# Altium PCB SimpleNode35.PcbDoc
Units mm, origin at the board's own origin, x right, y up, seen from the top; angles counter-clockwise.
Board outline 33 x 14 mm, 2 copper layers (Top Layer, Bottom Layer); 45 components, 43 nets, 178 pads, 33 vias.
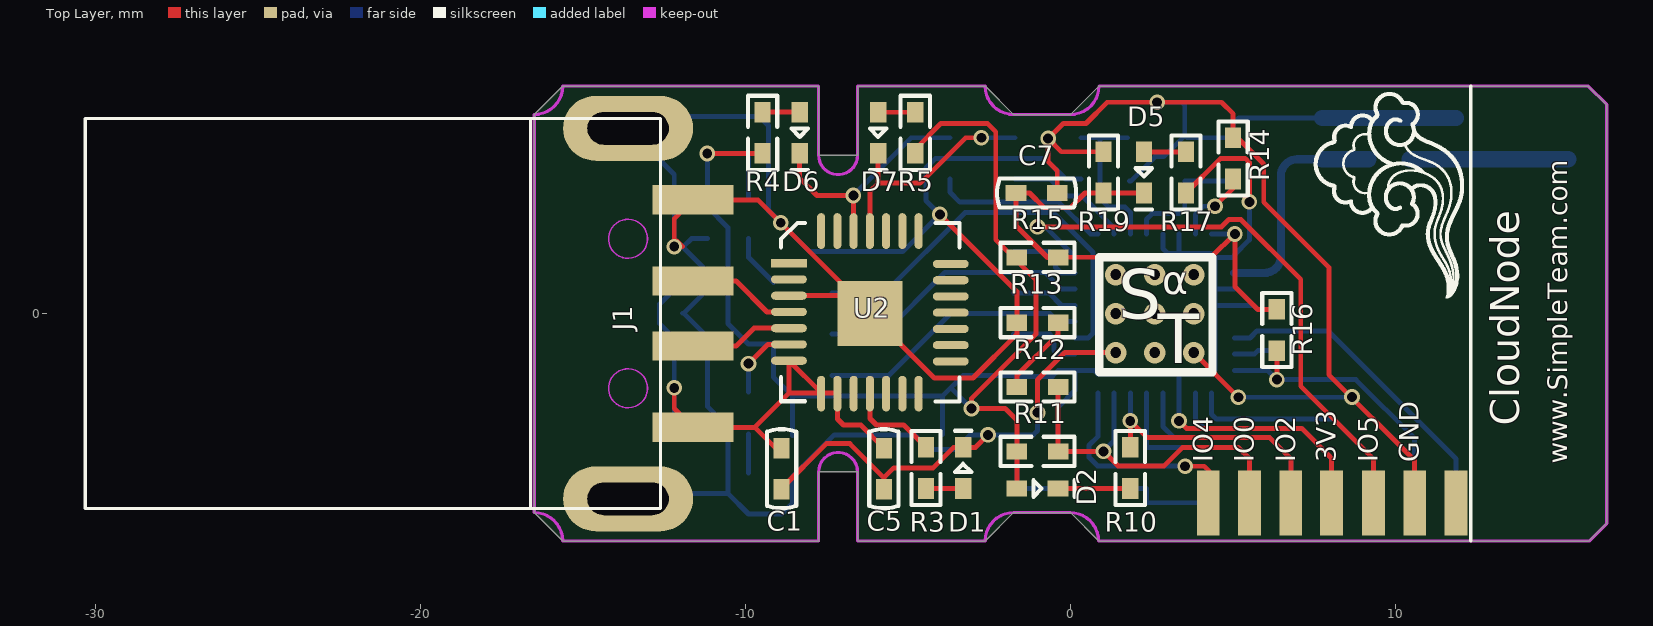
[diagram p0: Top Layer view]
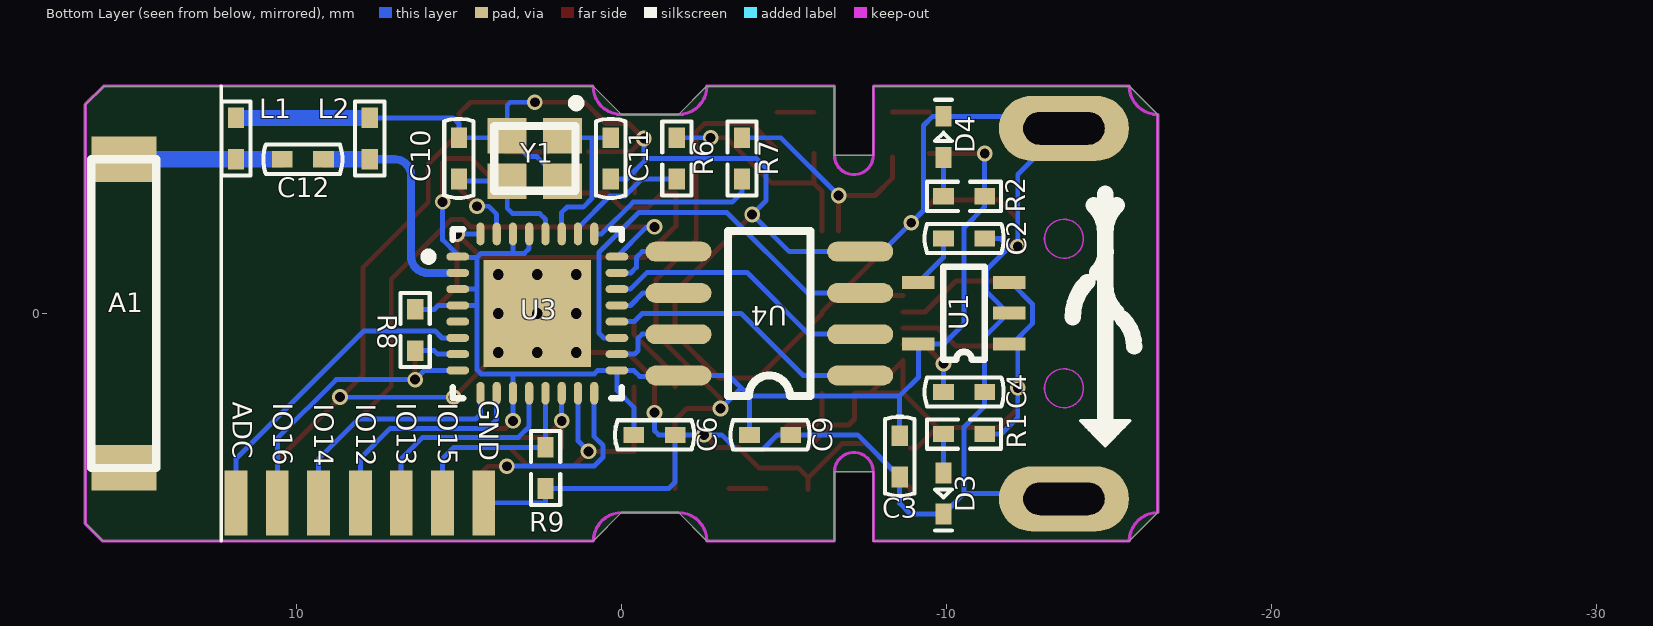
[diagram p1: Bottom Layer view, seen from below]

## Layer stack, top to bottom
Top Layer: signal copper 0.0356
Dielectric: dielectric 0.32, FR-4, Dk 4.8
Bottom Layer: signal copper 0.0356

## Board outline
16.5,6.436 15.936,7 0.875,7 0,6.125 -1.75,6.125 -2.625,7 -6.55,7 -6.55,4.875 -7.75,4.875 -7.75,7 -15.625,7 -16.5,6.125 -16.5,-6.125 -15.625,-7 -7.75,-7 -7.75,-4.875 -6.55,-4.875 -6.55,-7 -2.625,-7 -1.75,-6.125 0,-6.125 0.864,-6.989 0.864,-7 15.962,-7 16.5,-6.462 16.5,6.436

## Design rules (kind name [scope] priority, off if disabled: settings)
Clearance [All] p1: gap=0.127
DiffPairsRouting [All] p1: maxlimit=0.254 minlimit=0.254 mostfreqgap=0.254 maxuncoupledlength=12.7
MinimumSolderMaskSliver [All] p1 off: minsoldermaskwidth=0.127
PolygonConnect [All] p1: connectstyle=Relief reliefconductorwidth=0.254 reliefentries=4 polygonreliefangle="90 Angle"
RoutingVias [All] p1: holewidth=0.305 width=0.483 viastyle="Through Hole" minholewidth=0.305 minwidth=0.483 maxholewidth=0.711 maxwidth=1.27
SilkToSilkClearance [All] p1 off: silktosilkclearance=0.127
SilkscreenOverComponentPads [All] p1 off: minsilkscreentomaskgap=0.127
SolderMaskExpansion [All] p1: expansion=0.102
Width [All] p1: maxlimit=0.508 minlimit=0.152 preferedwidth=0.152
24 further rules are at their usual default settings.

## Classes and differential pairs
differential pair UD: +UD_P -UD_N

## Components (designator, comment, footprint, x,y, rotation, side; value= is the part's Value field where it differs from the comment)
A1 "2.4GHz" AN9520-245 15.316,0 r180 bottom
C1 "105" C0402 -8.89,-4.775 r90 top
C2 "CAP" C0402 -10.541,2.311 r0 bottom
C3 "CAP" C0402 -8.56,-4.394 r90 bottom
C4 "10V" C0402 -10.541,-2.413 r0 bottom
C5 "10V" C0402 -5.74,-4.775 r270 top
C6 "10V" C0402 -1.016,-3.734 r0 bottom
C7 "10V" C0402 -1.041,3.708 r180 top
C9 "10V" C0402 -4.572,-3.734 r0 bottom
C10 "10V" C0402 5.004,4.775 r90 bottom locked
C11 "10V" C0402 0.33,4.775 r270 bottom locked
C12 "10V" C0402 9.804,4.75 r180 bottom
D1 "STA" LED0402 -3.302,-4.75 r90 top
D2 "STA" LED0402 -1.016,-5.385 r0 top
D3 "PW5V" LED0402 -9.906,-5.537 r270 bottom
D4 "PW3V3" LED0402 -9.906,5.436 r90 bottom
D5 "STA" LED0402 2.261,4.343 r270 top
D6 "TXD" LED0402 -8.331,5.563 r270 top
D7 "RXD" LED0402 -5.918,5.563 r270 top
J1 "USB-A" "USB 2.0 Type A 公头 沉板" -13.614,0 r0 top
L1 "NC" L0402 11.862,5.385 r90 bottom
L2 "NC" L0402 7.747,5.385 r90 bottom
R1 "5%" R0402 -10.541,-3.708 r0 bottom
R2 "5%" R0402 -10.541,3.607 r180 bottom
R3 "5%" R0402 -4.445,-4.75 r270 top
R4 "5%" R0402 -9.474,5.563 r270 top
R5 "5%" R0402 -4.775,5.563 r90 top
R6 "5%" R0402 -1.702,4.775 r90 bottom
R7 "5%" R0402 -3.708,4.775 r270 bottom
R8 "1%" R0402 6.35,-0.508 r270 bottom
R9 "5%" R0402 2.337,-4.75 r90 bottom
R10 "5%" R0402 1.841,-4.75 r90 top
R11 "5%" R0402 -1.016,-4.242 r180 top
R12 "5%" R0402 -1.016,-2.261 r180 top
R13 "FLASH" R0402 -1.016,-0.279 r0 top
R14 "1%" R0402 5.004,4.775 r90 top
R15 "5%" R0402 -1.016,1.727 r180 top
R16 "5%" R0402 6.35,-0.508 r270 top
R17 "5%" R0402 3.556,4.343 r90 top
R19 "RESET" R0402 1.016,4.343 r270 top
U1 "SPX3819M5-L-3-3" SOT25-5 -10.541,0.076 r0 bottom
U2 "CP2102" MLP28 -6.172,0 r0 top locked
U3 "ESP8266" QFN32L 2.591,0 r180 bottom
U4 "2M Flash" SOP8 -4.547,0 r0 bottom locked
Y1 "10ppm" XTAL-2520 2.667,4.775 r0 bottom locked

## Footprints (in the part's own frame and the unit in brackets; to place one, negate y for a bottom-side part, rotate by r counter-clockwise, add the part's x,y. Pads: shape width x height; smd on the part's side, far side on the other; paste and mask are expansions set on the pad)
AN9520-245 [mm]
  rect 2x1.4 smd: 0(0,-4.75) 1(0,4.75)
  silkscreen extent -1,-4.75 1,4.75
C0402 [mm]
  rect 0.635x0.5 smd: 1(-0.635,0) 2(0.635,0)
  silkscreen extent -1.22,-0.45 1.22,0.45
L0402 [mm]
  rect 0.635x0.5 smd: 1(-0.635,0) 2(0.635,0)
  silkscreen extent -1.14,-0.45 1.14,0.45
LED0402 [mm]
  rect 0.635x0.5 smd: 1(-0.632,0) 2(0.633,0)
  silkscreen extent -0.13,-0.25 1.14,0.25
MLP28 [mm]
  rect 1.1x0.25 smd: 1(-2.489,1.549)
  oval 1.1x0.25 smd: 2(-2.489,1.049) 3(-2.489,0.549) 4(-2.489,0.049) 5(-2.489,-0.451) 6(-2.489,-0.951) 7(-2.489,-1.451) 15(2.489,-1.473) 16(2.489,-0.973) 17(2.489,-0.473) 18(2.489,0.027) 19(2.489,0.527) 20(2.489,1.027) 21(2.489,1.527)
  rect 2x2 smd: 3(0,0)
  oval 0.25x1.1 smd: 8(-1.499,-2.464) 9(-0.999,-2.464) 10(-0.499,-2.464) 11(0.001,-2.464) 12(0.501,-2.464) 13(1.001,-2.464) 14(1.501,-2.464) 22(1.499,2.54) 23(0.999,2.54) 24(0.499,2.54) 25(-0.001,2.54) 26(-0.501,2.54) 27(-1.001,2.54) 28(-1.501,2.54)
  silkscreen extent -2.74,-2.71 2.76,2.79
QFN32L [mm]
  oval 0.7x0.25 smd: 1(-2.45,1.75) 2(-2.45,1.25) 3(-2.45,0.75) 4(-2.45,0.25) 5(-2.45,-0.25) 6(-2.45,-0.75) 7(-2.45,-1.25) 8(-2.45,-1.75) 17(2.45,-1.75) 18(2.45,-1.25) 19(2.45,-0.75) 20(2.45,-0.25) 21(2.45,0.25) 22(2.45,0.75) 23(2.45,1.25) 24(2.45,1.75)
  oval 0.25x0.7 smd: 9(-1.75,-2.45) 10(-1.25,-2.45) 11(-0.75,-2.45) 12(-0.25,-2.45) 13(0.25,-2.45) 14(0.75,-2.45) 15(1.25,-2.45) 16(1.75,-2.45) 25(1.75,2.45) 26(1.25,2.45) 27(0.75,2.45) 28(0.25,2.45) 29(-0.25,2.45) 30(-0.75,2.45) 31(-1.25,2.45) 32(-1.75,2.45)
  rect 3.3x3.3 smd: 33(0,0)
  silkscreen extent -3.48,-2.6 2.6,2.6, body extent -2.58,-2.58 2.58,2.58, height 0.8
R0402 [mm]
  rect 0.635x0.5 smd: 1(-0.635,0) 2(0.635,0)
  silkscreen extent -1.14,-0.45 1.14,0.45
SOP8 [mil]
  oval 80x24 smd: 1(-110,75) 2(-110,25) 3(-110,-25) 4(-110,-75) 5(110,-75) 6(110,-25) 7(110,25) 8(110,75)
  silkscreen extent -50,-100 50,100, body extent -125,-98 125,99, height 74
SOT25-5 [mm]
  rect 1x0.4 smd: 1(-1.397,1.016) 2(-1.397,0.066) 3(-1.397,-0.884) 4(1.403,-0.884) 5(1.403,1.016)
  silkscreen extent -0.64,-1.36 0.64,1.49
"USB 2.0 Type A 公头 沉板" [mm]
  oval 1.5x1.4 on Bottom Overlay: 1(-1.27,3.683)
  rect 2.5x0.9 smd: 1(2,-3.5) 2(2,-1) 3(2,1) 4(2,3.5)
  oval 4x2 hole 1 slot 2.5 at 0 deg: 4(0,-5.7) 4(0,5.7)
  Keep-Out Layer circle w0.05: c0,-2.3 r0.6
  Keep-Out Layer circle w0.05: c0,2.3 r0.6
  silkscreen extent -16.7,-6 1,6
XTAL-2520 [mm]
  rect 1.2x1.1 smd: 1(-0.85,-0.7) 2(0.85,-0.7) 3(0.85,0.7) 4(-0.85,0.7)
  silkscreen extent -1.4,-1.83 1.25,1

## Part data
A1: library part AN9520-245
C1 C7: library part 贴片无极性电容
D1 D2 D3 D4: library part 贴片发光二级管
D5 D6 D7: library part 贴片发光二级管, "贴片发光二级管"
R4 R5 R6 R7 R15 R16 R17 R19: library part 贴片电阻
U4: library part GD25Q16CSIG

## Free pads (board coordinates)
  rect 0.7x2 smd: 1(4.242,-5.822) 2(5.511,-5.822) 3(6.781,-5.822) 4(8.033,-5.822) 5(9.321,-5.822) 6(10.591,-5.822) 7(11.861,-5.822)
  rect 0.7x2 smd far side: 8(4.241,-5.822) 9(5.511,-5.822) 10(6.781,-5.822) 11(8.033,-5.822) 12(9.321,-5.822) 13(10.591,-5.822) 14(11.861,-5.822)

## Via types
v1: diameter 0.483, hole 0.305, Top Layer to Bottom Layer, 24 vias
v2: diameter 0.66, hole 0.33, Top Layer to Bottom Layer, tented top, 9 vias

## Nets (pads, with @x,y where several pads share a name; then routed paths per layer and width w, separated by ;. In a path a pad name is that pad's centre, name@x,y a point inside that pad or via, vN(x,y) a via of type N, cw(c..) or ccw(c..) an arc to the next point about the centre after c; other vN are vias at no path point)
ADC: pad.14 U3.6 | length 9.9
  Bottom Layer w0.152: U3.6 5.524,-0.75 5.74,-0.533 7.925,-0.533 11.862,-4.47 pad.14
GND: C1.1 C2.1 C3.1 C4.1 C5.2 C6.1 C7.1 C9.1 C10.2 C11.2 D1.2 D3.2 D4.2 J1.4 L1.2 L2.2 pad.6 pad.8 R9.1 R13.1 R14.2 R19.1 U1.2 U2.3 U3.33 U4.4 Y1.2 Y1.4 | length 138.9
  Top Layer w0.152: v1@-12.116,2.235 -11.938,2.057 v1(-12.192,2.057) -12.192,2.922 -11.614,3.5 -9.621,3.5 v1(-8.915,2.794) -6.172,0.051 -6.172,0 -4.191,-1.981 -2.997,-1.981 -1.651,-0.635 R13.1@-1.651,-0.33 ; C1.1 -8.89,-5.385 -7.51,-4.005 -6.79,-4.005 -5.74,-5.054 ; U2.3@-8.661,0.549 U2.3@-6.722,0.549 ; C5.2 -5.74,-5.054 ; v1(-4.02,3.048) -1.651,0.679 R13.1 ; v1(-2.54,-3.734) -2.923,-4.117 D1.2 -3.593,-4.117 -4.225,-4.75 -5.436,-4.75 -5.74,-5.054 ; v1(-1.016,-3.048) -1.016,-2.041 -0.175,-1.2 v2(1.391,-1.2) ; C7.1 -0.406,4.394 -0.686,4.674 v1(-0.686,5.385) ; R19.1 -0.279,4.978 v1(-0.686,5.385) ; v2(3.791,-1.2) v1(5.166,-2.575) ; pad.6 10.592,-4.521 7.95,-1.88 7.95,1.422 5.948,3.425 5.948,4.6 5.138,5.41 R14.2 5.004,6.147 4.648,6.502 v1(2.667,6.502) 1.129,6.502 0.476,5.85 -0.221,5.85 v1(-0.686,5.385)
  Bottom Layer w0.152: J1.4@-13.449,-5.535 -10.541,-5.535 ; J1.4@-13.246,6.068 J1.4@-11.824,6.068 ; J1.4@-12.538,4.886 -12.538,5.354 J1.4@-11.824,6.068 ; J1.4@-12.192,5.055 J1.4@-13.614,5.7 ; U1.2 U1.2@-11.901,0.01 ; C2.1 -11.659,2.311 -11.913,2.057 -11.938,2.057 ; v1(-1.016,-3.048) -1.016,-3.607 -1.143,-3.734 C6.1 ; v1(-0.686,5.385) -0.686,4.877 -0.787,4.775 ; C11.2 -0.152,4.14 -0.787,4.775 ; Y1.4 1.854,4.075 2.608,4.828 2.87,4.828 Y1.2 3.517,6.414 3.429,6.502 v1(2.667,6.502) ; Y1.2@3.582,5.41 C10.2 5.004,5.842 5.182,6.02 L2.2 ; pad.8@4.343,-5.822 2.337,-5.822 R9.1 -1.448,-5.385 -1.651,-5.182 C6.1 ; v1(5.166,-2.575) v1@8.652,-2.575 ; J1.4@-13.614,5.7 -12.192,4.278 v1(-12.192,2.057) -11.938,2.057 ; J1.4@-13.614,5.7 -12.192,5.7 J1.4@-11.824,6.068 ; -11.938,2.057 -11.235,1.354 -11.235,0.676 U1.2@-11.901,0.01 ; U1.2@-11.901,0.01 -11.176,-0.714 C4.1 -11.176,-2.854 -10.541,-3.489 -10.541,-5.535 ; J1.4@-11.824,6.068 D4.2 -9.573,6.068 -9.294,5.789 -9.294,3.173 v1(-8.915,2.794) -8.026,1.905 U4.4 -5.163,1.905 v1(-4.02,3.048) -4.445,3.473 -4.445,4.478 -4.147,4.775 -0.787,4.775 ; -10.541,-5.535 D3.2 -8.888,-6.17 -8.56,-5.842 C3.1 -7.264,-3.734 C9.1 -4.792,-3.734 -4.339,-4.187 -3.535,-4.187 -3.082,-3.734 v1(-2.54,-3.734) C6.1
  Bottom Layer w0.5: L2.2 L1.2
  other v1: 8.661,-2.565
  other v2: 2.591,-1.2 1.391,0 2.591,0 3.791,0 1.391,1.2 2.591,1.2 3.791,1.2
GPIO0: pad.2 R11.1 R12.1 U3.15 | length 11.7
  Top Layer w0.152: R12.1 R11.1 v1(1.016,-4.242) 1.46,-4.686 2.883,-4.686 3.454,-4.115 5.156,-4.115 5.512,-4.47 pad.2
  Bottom Layer w0.152: v1(1.016,-4.242) 1.341,-3.917 U3.15
GPIO2: pad.3 R10.2 U3.14 | length 8.4
  Top Layer w0.152: R10.2 v1(1.841,-3.302) 2.349,-3.81 6.121,-3.81 6.782,-4.47 pad.3
  Bottom Layer w0.152: v1(1.841,-3.302) U3.14
GPIO4: pad.1 U3.16 | length 7
  Top Layer w0.152: v1(3.531,-4.699) 4.115,-4.699 4.343,-4.928 pad.1@4.343,-5.131 ; pad.1 pad.1@4.242,-5.131
  Bottom Layer w0.152: U3.16 0.841,-3.788 0.572,-4.058 0.572,-4.426 0.832,-4.686 v1@3.531,-4.686
GPIO5: pad.5 U3.24 | length 18.3
  Top Layer w0.152: v1(-1.016,2.667) 4.647,2.667 4.875,2.895 5.243,2.895 7.087,1.051 7.087,-2.235 9.321,-4.47 pad.5
  Bottom Layer w0.152: v1(-1.016,2.667) -0.776,2.667 U3.24
GPIO12: pad.11 U3.10 | length 6.9
  Bottom Layer w0.152: U3.10 3.841,-3.257 4.115,-3.531 7.112,-3.531 8.033,-4.452 pad.11
GPIO13: pad.10 U3.12 | length 6.7
  Bottom Layer w0.152: U3.12 2.841,-3.476 3.175,-3.81 6.121,-3.81 6.782,-4.47 pad.10
GPIO14: pad.12 U3.9 | length 7.5
  Bottom Layer w0.152: U3.9 4.341,-3.096 4.496,-3.251 8.103,-3.251 9.321,-4.47 pad.12
GPIO15: pad.9 R9.2 U3.13 | length 6.3
  Bottom Layer w0.152: R9.2 5.156,-4.115 5.512,-4.47 pad.9 ; R9.2@2.341,-4.111 U3.13
GPIO16: pad.13 R16.2 U3.8 | length 9.3
  Top Layer w0.152: v1(6.35,-2.032) R16.2
  Bottom Layer w0.152: U3.8 6.068,-1.75 v1(6.35,-2.032) 8.782,-2.032 10.592,-3.842 pad.13
NetA1_1: A1.1 C12.1 L1.1 | length 4.9
  Bottom Layer w0.5: C12.1 L1.1 A1.1
NetC2_2: C2.2 U1.4 | length 1.7
  Bottom Layer w0.152: C2.2 -9.906,1.728 U1.4
NetC4_2: C4.2 U2.6 | length 2.4
  Top Layer w0.152: v1(-9.906,-1.542) -9.315,-0.951 U2.6
  Bottom Layer w0.152: C4.2 v1(-9.906,-1.542)
NetC7_2: C7.2 D5.2 R15.1 R16.1 R19.2 U3.32 | length 16.7
  Top Layer w0.152: D5.2@2.258,3.708 R19.2 0.448,3.708 -0.005,3.255 -0.808,3.255 -1.261,3.708 C7.2 -1.676,2.699 -0.705,1.727 R15.1 -0.375,1.733 4.324,1.733 v1(5.059,2.45) 5.059,0.834 5.766,0.127 R16.1
  Bottom Layer w0.152: U3.32 v1(5.059,2.45)
NetC10_1: C10.1 U3.28 Y1.3 | length 4
  Bottom Layer w0.152: U3.28 2.341,2.9 2.515,3.073 3.353,3.073 3.517,3.238 Y1.3 C10.1@4.939,4.075
NetC11_1: C11.1 U3.27 Y1.1 | length 5.1
  Bottom Layer w0.152: C11.1 Y1.1@1.752,5.41 ; 0.914,5.41 0.914,3.54 1.178,3.277 1.676,3.277 1.841,3.112 U3.27
NetC12_2: C12.2 L2.1 U3.2 | length 7.2
  Bottom Layer w0.25: U3.2 5.969,1.25 ccw(c5.969,1.758) 6.477,1.758 6.477,4.242 cw(c6.985,4.242) 6.985,4.75 L2.1
  Bottom Layer w0.5: L2.1 C12.2
NetD1_1: D1.1 R3.2 | length 1.1
  Top Layer w0.152: R3.2 D1.1@-3.305,-5.385
NetD2_2: D2.2 R10.1 | length 2.2
  Top Layer w0.152: D2.2 R10.1
NetD3_1: D3.1 R1.2 | length 1.2
  Bottom Layer w0.152: D3.1 R1.2
NetD4_1: D4.1 R2.1 | length 1.2
  Bottom Layer w0.152: R2.1 D4.1
NetD5_1: D5.1 R17.2 | length 1.3
  Top Layer w0.152: D5.1 R17.2@3.553,4.976
NetD6_1: D6.1 R4.1 | length 1.1
  Top Layer w0.152: R4.1 D6.1@-8.334,6.198
NetD7_1: D7.1 R5.2 | length 1.1
  Top Layer w0.152: D7.1 R5.2@-4.778,6.195
NetR3_1: R3.1 U2.11 | length 2.9
  Top Layer w0.152: U2.11 -6.171,-3.227 -5.969,-3.429 -5.131,-3.429 R3.1
NetR8_2: R8.2 U3.7 | length 1.4
  Bottom Layer w0.152: U3.7 5.659,-1.25 5.766,-1.143 R8.2
NetR12_2: R12.2 R13.2 | length 2.5
  Top Layer w0.152: R12.2 -1.651,-1.905 -0.381,-0.635 R13.2
NetR14_1: R14.1 U3.31 | length 2.1
  Top Layer w0.152: v1(4.445,3.302) R14.1@5.004,3.861
  Bottom Layer w0.152: U3.31 3.841,3.053 4.089,3.302 v1(4.445,3.302)
RXD: D7.2 R6.2 U2.25 | length 7.3
  Top Layer w0.152: U2.25 -6.174,3.758 -5.918,4.013 ; D7.2 -5.918,4.013 ; v1(-2.743,5.41) -3.226,5.41 -4.623,4.013 -5.918,4.013
  Bottom Layer w0.152: v1(-2.743,5.41) R6.2
SD_CLK: U3.21 U4.6 | length 2.1
  Bottom Layer w0.152: U4.6 -0.66,0.635 -0.275,0.25 U3.21
SD_CMD: U3.20 U4.1 | length 8.4
  Bottom Layer w0.152: U4.1 -5.588,-1.905 -3.683,0 -0.635,0 -0.385,-0.25 U3.20
SD_DATA_0: U3.22 U4.2 | length 8.5
  Bottom Layer w0.152: U4.2 -5.766,-0.635 -3.861,1.27 -0.787,1.27 -0.267,0.75 U3.22
SD_DATA_1: U3.23 U4.5 | length 2.3
  Bottom Layer w0.152: U4.5 -0.635,1.905 -0.457,1.727 -0.457,1.422 -0.285,1.25 U3.23
SD_DATA_2: U3.18 U4.7 | length 2.4
  Bottom Layer w0.152: U4.7 -0.635,-0.635 -0.508,-0.762 -0.508,-1.143 -0.401,-1.25 U3.18
SD_DATA_3: U3.19 U4.3 | length 12.7
  Bottom Layer w0.152: U4.3 -5.715,0.635 -3.238,3.111 -0.532,3.111 0.694,1.886 0.694,-0.601 0.545,-0.75 U3.19
TXD: D6.2 R7.1 U2.26 | length 7.3
  Top Layer w0.152: D6.2@-8.331,4.826 -8.331,4.166 -7.798,3.632 v1(-6.68,3.632) ; U2.26 v1@-6.674,3.632
  Bottom Layer w0.152: v1(-6.68,3.632) -4.902,5.41 R7.1
U0RXD: R7.2 U3.25 | length 5.5
  Bottom Layer w0.152: R7.2 -3.708,3.734 -3.404,3.429 -0.356,3.429 0.623,2.45 U3.25
U0TXD: R6.1 U3.26 | length 3.9
  Bottom Layer w0.152: R6.1 -0.625,4.14 -0.104,3.619 0.36,3.619 1.335,2.645 1.335,2.455 U3.26
UD_N: J1.2 U2.5 | length 3.2
  Top Layer w0.152: J1.2 -10.287,-1 -9.738,-0.451 U2.5
UD_P: J1.3 U2.4 | length 3.3
  Top Layer w0.152: J1.3 -10.287,1 -9.336,0.049 U2.4
VCC3V3: C3.2 C6.2 C9.2 D2.1 pad.4 R2.2 R4.2 R5.1 R8.1 R11.2 R15.2 R17.1 U1.5 U3.1 U3.3 U3.4 U3.11 U3.17 U3.29 U3.30 U4.8 | length 68.8
  Top Layer w0.152: v1(-11.176,4.928) R4.2 ; R5.1@-4.775,5.061 -3.982,5.855 -2.559,5.855 -2.299,5.594 -2.299,2.273 -1.067,1.041 -1.067,-0.635 -3.048,-2.616 v1(-3.048,-2.921) -2.007,-2.921 -1.651,-3.277 R11.2 D2.1@-1.651,-5.382 ; v1(3.341,-3.302) 3.57,-3.531 7.112,-3.531 8.033,-4.452 pad.4 ; R17.1 4.623,4.775 5.378,4.775 5.503,4.649 v1(5.503,3.437)
  Bottom Layer w0.152: v1(-11.176,4.928) R2.2 -11.176,3.285 -10.541,2.65 -10.541,-0.305 -9.906,-0.94 U1.5 -9.138,-1.956 -8.56,-2.534 ; C3.2 -8.56,-2.534 ; C9.2@-3.931,-3.728 -3.931,-2.534 ; -3.67,-2.299 v1(-3.048,-2.921) ; U4.8 -3.302,-1.905 -3.931,-2.534 ; U4.8@-1.727,-1.93 -0.559,-1.93 -0.378,-1.75 U3.17 0.141,-2.364 -0.381,-2.886 C6.2 ; U3.17@0.143,-1.753 0.737,-1.753 0.837,-1.853 4.325,-1.853 4.444,-1.734 4.444,1.728 ; U3.29 2.841,2.003 2.99,1.853 4.325,1.853 4.444,1.734 4.444,1.728 ; v1(3.341,-3.302) U3.11 3.341,-1.865 ; 3.341,1.865 U3.30 ; 4.457,0.75 U3.3 ; 4.465,0.25 U3.4 ; U3.1@5.019,1.728 4.444,1.728 ; U3.1 5.041,1.804 5.503,2.266 v1(5.503,3.437) ; U3.4@5.045,0.254 5.639,0.254 5.766,0.127 R8.1 ; -8.56,-2.534 -3.931,-2.534
VCC5V: C1.2 C5.1 J1.1@-11.614,-3.5 R1.1 U1.1 U1.3 U2.7 U2.8 U2.9 | length 18.2
  Top Layer w0.152: v1(-12.192,-2.286) -12.192,-2.922 -11.614,-3.5 -9.711,-3.5 ; C1.2 -9.071,-4.14 -9.711,-3.5 ; -8.661,-2.432 U2.7 U2.8@-7.671,-2.441 ; U2.9@-7.193,-2.441 U2.8@-7.671,-2.441 ; U2.9 -7.171,-3.243 -6.985,-3.429 -6.452,-3.429 C5.1 ; -9.711,-3.5 -8.652,-2.441 U2.8@-7.671,-2.441
  Bottom Layer w0.152: U1.1@-12.192,-1.118 v1(-12.192,-2.286) -12.192,-3.2 -11.684,-3.708 R1.1 ; U1.1@-12.014,-0.94 -12.641,-0.313 -12.641,0.294 -11.975,0.96 U1.3 ; U1.3@-11.557,0.96 U1.3@-11.52,0.96
pads on no net: A1.0 J1.1@-14.884,3.683 U2.1 U2.2 U2.10 U2.12 U2.13 U2.14 U2.15 U2.16 U2.17 U2.18 U2.19 U2.20 U2.21 U2.22 U2.23 U2.24 U2.27 U2.28 U3.5

## Keep-outs
Keep-Out Layer:
  lines w0.1: -0.011,-6.125 cw(c-0.011,-7) 0.864,-7 ; 0,-6.125 -1.75,-6.125 ccw(c-1.75,-7) -2.625,-7 -6.55,-7 -6.55,-4.875 ccw(c-7.15,-4.875) -7.75,-4.875 -7.75,-7 -15.625,-7 ccw(c-16.5,-7) -16.5,-6.125 -16.5,6.125 ccw(c-16.5,7) -15.625,7 -7.75,7 -7.75,4.875 ccw(c-7.15,4.875) -6.55,4.875 -6.55,7 -2.625,7 ccw(c-1.75,7) -1.75,6.125 0,6.125 ccw(c0,7) 0.875,7 15.936,7 16.5,6.436 16.5,-6.462 15.962,-7 0.875,-7

## Silkscreen, mask and mechanical layers (free items; w line width, h text height)
Top Overlay:
  drawing of 3502 lines, arcs and shapes, not listed
  text "α" at 2.819,0.305 h1.52
  text "S" at 1.467,-0.152 h1.52
  text "T" at 2.692,-1.524 h1.52
  text "CloudNode" at 14.097,-3.454 h1.52 r90
  text "IO4" at 4.572,-4.572 h1.02 r90
  text "IO0" at 5.842,-4.572 h1.02 r90
  text "IO2" at 7.112,-4.572 h1.02 r90
  text "3V3" at 8.357,-4.572 h1.02 r90
  text "IO5" at 9.652,-4.572 h1.02 r90
  text "GND" at 10.922,-4.572 h1.02 r90
  text "www.SimpleTeam.com" at 15.494,-4.623 h1.02 r90
Bottom Overlay:
  lines w0.1: 12.316,-7 12.316,7
  text "GND" at 4.572,-2.667 h1.02 r90
  text "ADC" at 12.167,-2.718 h1.02 r90
  text "IO15" at 5.842,-2.743 h1.02 r90
  text "IO13" at 7.112,-2.743 h1.02 r90
  text "IO16" at 10.922,-2.743 h1.02 r90
  text "IO12" at 8.357,-2.769 h1.02 r90
  text "IO14" at 9.652,-2.769 h1.02 r90